# EAGLE board Gleisbesetzmeldung3 (EAGLE 8.1.0)
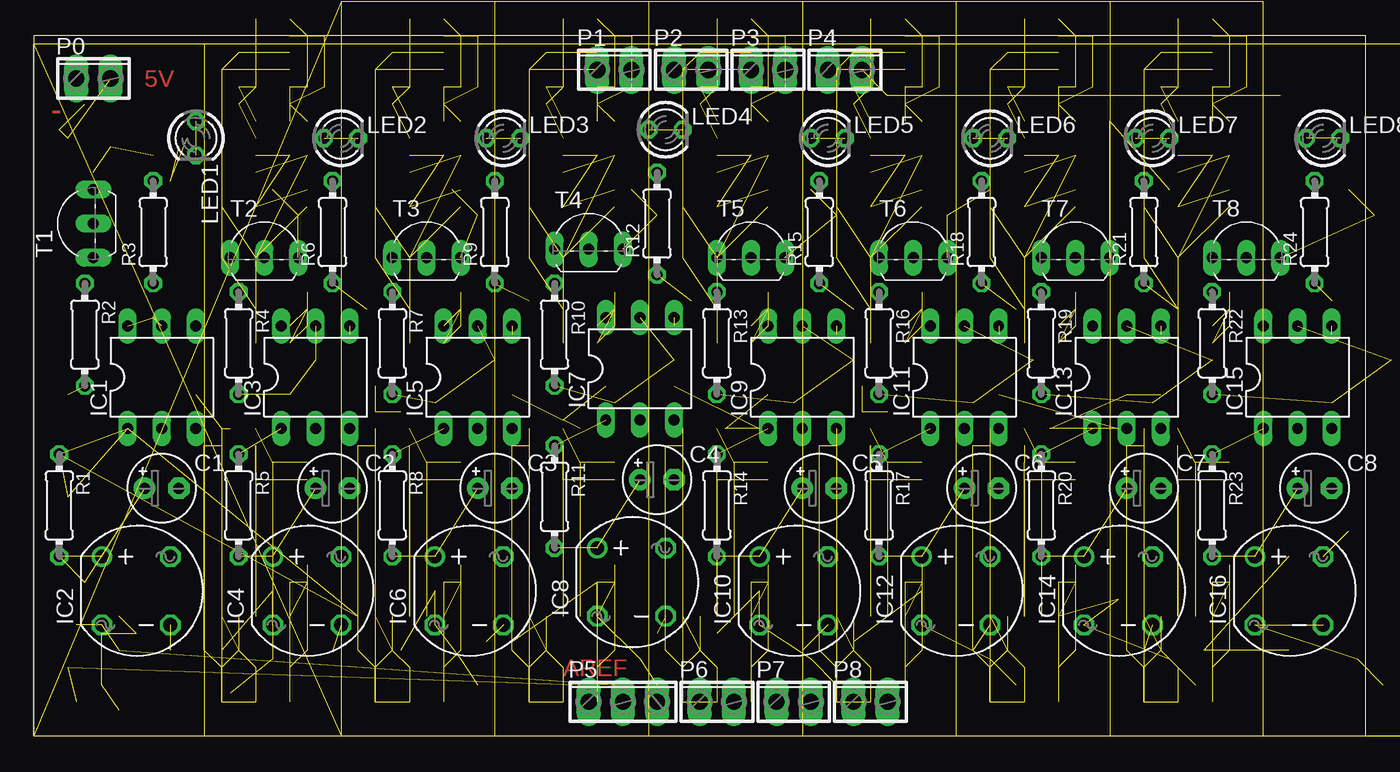
[diagram p0: board, top side]
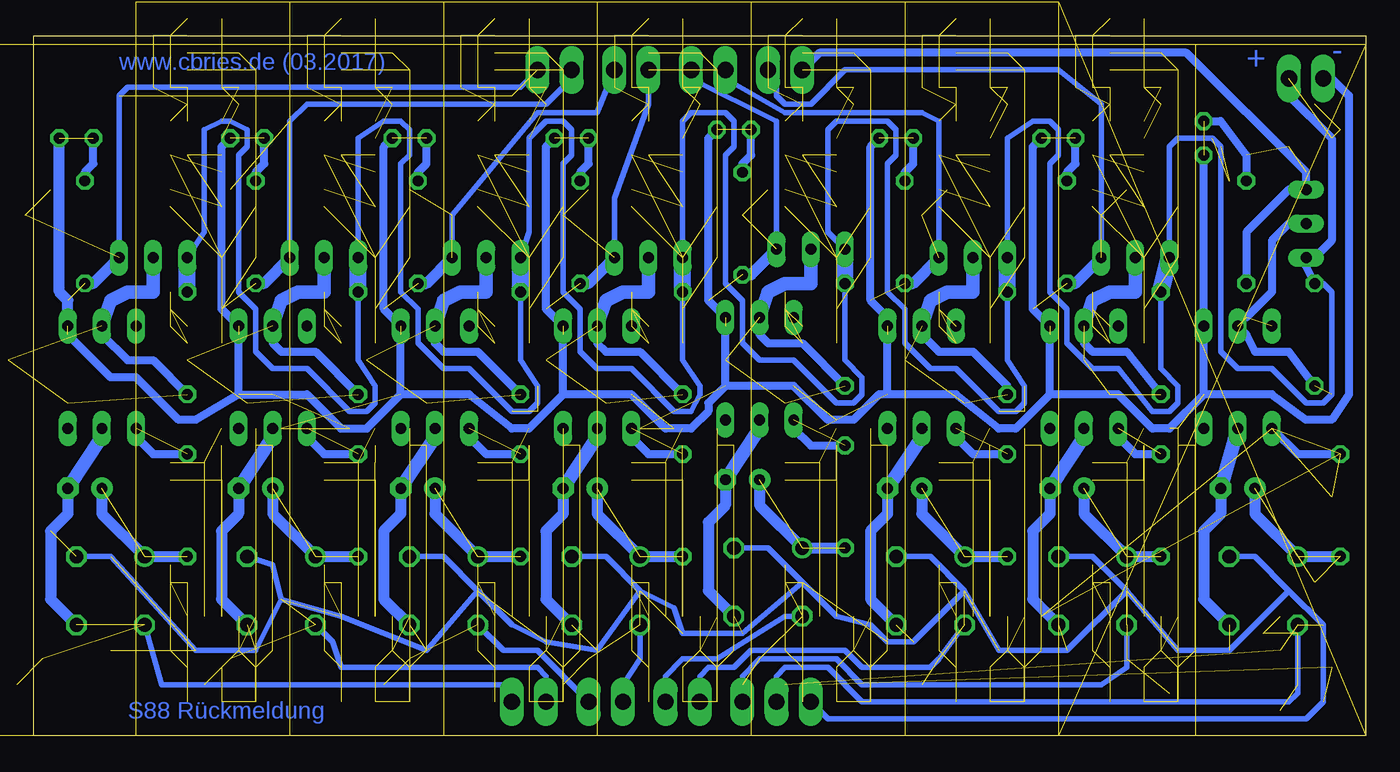
[diagram p1: board, bottom side, seen from below]

Size 99.06 x 52.07 mm. Coordinates in mm from the lower left corner, seen from the top.
Outline: 0,0 99.06,0 99.06,52.07 0,52.07 0,0
Copper layers (1*16): Top 0.035mm / dielectric 1.5mm / Bottom 0.035mm
Design rules "default": minimum track width 10mil, minimum drill 24mil, track to track 8mil, track to pad 8mil, pad to pad 8mil, via to via 8mil, smd to smd 8mil, copper to edge 40mil, drill to drill 8mil, minimum pad ring 10mil, minimum via ring 8mil, stop-mask expansion 4mil, vias tented up to drill 0mil, thermal gap 10mil

## Footprints (pad centres in the part's own frame; a part is rotated, then mirrored left to right if it is on the bottom)
E2,5-5 = drill 0.813 pad 1.6: + -1.27,0 | drill 0.813 pad 1.6 octagon: - 1.27,0
DIL06 = drill 0.813 long: 1 -2.54,-3.81; 2 0,-3.81; 3 2.54,-3.81; 4 2.54,3.81; 5 0,3.81; 6 -2.54,3.81
RB1A = drill 1.016: + -2.54,2.54 | drill 1.016 octagon: - 2.54,-2.54; AC1 2.54,2.54; AC2 -2.54,-2.54
LED3MM = drill 0.813 octagon: A -1.27,0; K 1.27,0
2POL254 = drill 1.2 long: 1 -1.27,0; 2 1.27,0
3POL254 = drill 1.2 long: 1 -2.54,0; 2 0,0; 3 2.54,0
0204/7 = drill 0.813 octagon: 1 -3.81,0; 2 3.81,0
TO92-CBE = drill 0.813 long: B 0,0; C -2.54,0; E 2.54,0

## Placement (x,y rotation side)
C1  22uF, 35V  [E2,5-5]  9.53,18.41 0 top
C2  22uF, 35V  [E2,5-5]  22.23,18.41 0 top
C3  22uF, 35V  [E2,5-5]  34.29,18.41 0 top
C4  22uF, 35V  [E2,5-5]  46.35,19.05 0 top
C5  22uF, 35V  [E2,5-5]  58.42,18.41 0 top
C6  22uF, 35V  [E2,5-5]  70.48,18.41 0 top
C7  22uF, 35V  [E2,5-5]  82.55,18.41 0 top
C8  22uF, 35V  [E2,5-5]  95.25,18.41 0 top
IC1  CNY-17-2  [DIL06]  9.53,26.67 0 top
IC2  S462  [RB1A]  7.62,10.79 0 top
IC3  CNY-17-2  [DIL06]  20.95,26.67 0 top
IC4  S462  [RB1A]  20.32,10.79 0 top
IC5  CNY-17-2  [DIL06]  33.02,26.67 0 top
IC6  S462  [RB1A]  32.38,10.79 0 top
IC7  CNY-17-2  [DIL06]  45.09,27.3 0 top
IC8  S462  [RB1A]  44.45,11.43 0 top
IC9  CNY-17-2  [DIL06]  57.15,26.67 0 top
IC10  S462  [RB1A]  56.52,10.79 0 top
IC11  CNY-17-2  [DIL06]  69.22,26.67 0 top
IC12  S462  [RB1A]  68.58,10.79 0 top
IC13  CNY-17-2  [DIL06]  81.28,26.67 0 top
IC14  S462  [RB1A]  80.64,10.79 0 top
IC15  CNY-17-2  [DIL06]  93.98,26.67 0 top
IC16  S462  [RB1A]  93.34,10.79 0 top
LED1  [LED3MM]  12.06,44.45 270 top
LED2  [LED3MM]  22.86,44.45 0 top
LED3  [LED3MM]  34.92,44.45 0 top
LED4  [LED3MM]  46.99,45.09 0 top
LED5  [LED3MM]  59.05,44.45 0 top
LED6  [LED3MM]  71.12,44.45 0 top
LED7  [LED3MM]  83.19,44.45 0 top
LED8  [LED3MM]  95.89,44.45 0 top
P0  [2POL254]  4.45,48.9 0 top
P1  [2POL254]  43.18,49.53 0 top
P2  [2POL254]  48.9,49.53 0 top
P3  [2POL254]  54.61,49.53 0 top
P4  [2POL254]  60.33,49.53 0 top
P5  [3POL254]  43.81,2.54 0 top
P6  [2POL254]  50.8,2.54 0 top
P7  [2POL254]  56.52,2.54 0 top
P8  [2POL254]  62.23,2.54 0 top
R1  1k  [0204/7]  1.91,17.14 270 top
R2  1k  [0204/7]  3.81,29.84 270 top
R3  220  [0204/7]  8.89,37.47 90 top
R4  1k  [0204/7]  15.24,29.21 270 top
R5  1k  [0204/7]  15.24,17.14 270 top
R6  220  [0204/7]  22.23,37.47 90 top
R7  1k  [0204/7]  26.67,29.21 270 top
R8  1k  [0204/7]  26.67,17.14 270 top
R9  220  [0204/7]  34.29,37.47 90 top
R10  1k  [0204/7]  38.73,29.84 270 top
R11  1k  [0204/7]  38.73,17.78 270 top
R12  220  [0204/7]  46.35,38.1 90 top
R13  1k  [0204/7]  50.8,29.21 270 top
R14  1k  [0204/7]  50.8,17.14 270 top
R15  220  [0204/7]  58.42,37.47 90 top
R16  1k  [0204/7]  62.87,29.21 270 top
R17  1k  [0204/7]  62.87,17.14 270 top
R18  220  [0204/7]  70.48,37.47 90 top
R19  1k  [0204/7]  74.93,29.21 270 top
R20  1k  [0204/7]  74.93,17.14 270 top
R21  220  [0204/7]  82.55,37.47 90 top
R22  1k  [0204/7]  87.63,29.21 270 top
R23  1k  [0204/7]  87.63,17.14 270 top
R24  220  [0204/7]  95.25,37.47 90 top
T1  [TO92-CBE]  4.45,38.1 90 top
T2  [TO92-CBE]  17.14,35.56 0 top
T3  [TO92-CBE]  29.21,35.56 0 top
T4  [TO92-CBE]  41.27,36.2 0 top
T5  [TO92-CBE]  53.34,35.56 0 top
T6  [TO92-CBE]  65.41,35.56 0 top
T7  [TO92-CBE]  77.47,35.56 0 top
T8  [TO92-CBE]  90.17,35.56 0 top

## Library data of the parts
C1-C8 R1-R24 = rcl
IC1 IC3 IC5 IC7 IC9 IC11 IC13 IC15 = ic-package
IC2 IC4 IC6 IC8 IC10 IC12 IC14 IC16 = rectifier
LED1-LED8 = led
P0 P1-P8 = con-phoenix-254
T1-T8 = transistor-neu-to92

## Nets
S$2: IC5.5 IC5.6 R7.2 T3.B
S$3: IC1.5 IC1.6 P0.2 R2.1 R2.2 R4.1 R7.1 R10.1 R13.1 R16.1 R19.1 R22.1 T1.B T1.C T2.C T3.C T4.C T5.C T6.C T7.C T8.C
S$5: IC1.4 IC3.4 IC5.4 IC7.4 IC9.4 IC11.4 IC13.4 IC15.4 LED1.A LED1.K LED2.A LED2.K LED3.A LED3.K LED4.A LED4.K LED5.A LED5.K LED6.A LED6.K LED7.A LED7.K LED8.A LED8.K P0.1 P1.1 P1.2 P2.1 P2.2 P3.1 P3.2 P4.1 P4.2 R3.1 R3.2 R6.1 R6.2 R9.1 R9.2 R12.1 R12.2 R15.1 R15.2 R18.1 R18.2 R21.1 R21.2 R24.1 R24.2 T1.E T2.E T3.E T4.E T5.E T6.E T7.E T8.E
S$6: C2.+ IC4.+ R5.2
S$7: C1.+ IC2.+ R1.2
S$8: IC1.1 R1.1
S$11: IC3.1 R5.1
S$124: IC3.5 IC3.6 R4.2 T2.B
S$127: C3.+ IC6.+ R8.2
S$128: IC5.1 R8.1
S$133: C4.+ IC8.+ R11.2
S$134: IC7.1 R11.1
S$136: IC7.5 IC7.6 R10.2 T4.B
S$139: C5.+ IC10.+ R14.2
S$140: IC9.1 R14.1
S$142: IC9.5 IC9.6 R13.2 T5.B
S$145: C6.+ IC12.+ R17.2
S$146: IC11.1 R17.1
S$148: IC11.5 IC11.6 R16.2 T6.B
S$151: C7.+ IC14.+ R20.2
S$152: IC13.1 R20.1
S$154: IC13.5 IC13.6 R19.2 T7.B
S$157: C8.+ IC16.+ R23.2
S$158: IC15.1 R23.1
S$160: IC15.5 IC15.6 R22.2 T8.B
S$162: C1.- C2.- C3.- C4.- C5.- C6.- C7.- C8.- IC1.2 IC2.- IC2.AC1 IC2.AC2 IC3.2 IC4.- IC4.AC1 IC4.AC2 IC5.2 IC6.- IC6.AC1 IC6.AC2 IC7.2 IC8.- IC8.AC1 IC8.AC2 IC9.2 IC10.- IC10.AC1 IC10.AC2 IC11.2 IC12.- IC12.AC1 IC12.AC2 IC13.2 IC14.- IC14.AC1 IC14.AC2 IC15.2 IC16.- IC16.AC1 IC16.AC2 P5.1 P5.2 P5.3 P6.1 P6.2 P7.1 P7.2 P8.1 P8.2

## Tracks (layer width: path | path; a pad name or v marks a point on that pad's centre or on a via)
S$1  (28 unrouted)
S$2  (3 unrouted)
  Bottom 0.61: 33.02,29.84 31.75,28.57 29.21,28.57 26.67,26.04 R7.2
  Bottom 1.016: IC5.5 32.38,32.38 31.11,33.02 29.21,33.02 T3.B
S$3  (12 unrouted)
  Bottom 0.406: R2.1 3.17,33.66 2.54,33.02 2.54,25.4 3.17,24.77 4.45,24.77 6.99,27.3 9.53,27.3 10.79,28.57 10.79,43.81 11.43,44.45 13.97,44.45 14.61,43.81 T2.C | R4.1 15.24,27.3 13.97,26.04 13.97,24.77 14.61,24.13 15.88,24.13 18.41,27.3 20.32,27.3 22.23,29.21 22.23,31.75 23.5,33.02 23.5,42.55 22.86,43.18 22.86,45.09 23.5,45.72 24.77,45.72 26.67,44.45 T3.C | R7.1 26.67,27.94 25.4,26.04 25.4,24.77 26.04,24.13 27.3,24.13 30.48,27.3 32.38,27.3 34.29,29.21 34.29,31.75 35.56,33.02 35.56,42.55 34.92,43.18 34.92,45.09 35.56,45.72 39.37,45.72 40.01,45.09 40.01,37.47 T4.C | R10.1 38.73,27.94 37.47,26.67 37.47,25.4 38.1,24.77 39.37,24.77 42.55,27.94 45.09,27.94 46.35,29.21 46.35,32.38 47.62,33.66 47.62,43.18 46.99,43.81 46.99,45.72 47.62,46.35 50.16,46.35 50.8,45.72 T5.C | R13.1 50.8,27.94 49.53,26.04 49.53,25.4 50.16,24.13 51.44,24.13 54.61,27.3 57.15,27.3 58.42,28.57 58.42,31.75 59.69,33.02 59.69,42.55 59.05,43.18 59.05,45.09 59.69,45.72 60.96,45.72 62.23,44.45 62.23,37.47 T6.C | R16.1 62.87,27.94 61.59,26.04 61.59,24.77 62.23,24.13 63.5,24.13 66.67,27.3 68.58,27.3 70.48,29.21 70.48,31.75 71.75,33.02 71.75,42.55 71.12,43.18 71.12,45.09 71.75,45.72 73.03,45.72 74.93,44.45 T7.C | R19.1 74.93,27.94 73.66,26.04 73.66,24.77 74.3,24.13 75.56,24.13 78.74,27.3 81.28,27.3 82.55,28.57 82.55,31.75 83.82,33.02 83.82,43.18 83.19,43.81 83.19,45.09 84.45,45.72 85.09,45.72 86.36,45.09 86.36,37.47 T8.C
  Bottom 0.61: R2.1 4.45,34.92 T1.C 3.81,35.56 2.54,36.83 2.54,44.45 5.71,47.62 P0.2 | IC1.5 8.89,29.84 8.26,28.57 5.71,28.57 R2.2 | T1.B 5.71,38.1 6.99,36.83 6.99,33.02 8.89,31.11
  Bottom 1.27: R10.1 T4.C | R16.1 T6.C | R19.1 T7.C | R22.1 T8.C | R4.1 T2.C | R7.1 T3.C | R13.1 T5.C
S$5  (52 unrouted)
  Bottom 0.406: T2.E 19.68,46.99 22.86,49.53 38.73,49.53 41.27,46.99 43.18,46.99 43.81,47.62 43.81,48.9 P1.2 | T3.E 31.75,45.72 33.02,46.35 43.18,46.35 47.62,48.9 P2.1 | T4.E 43.81,45.72 50.16,48.9 P2.2 | T5.E 55.88,40.01 53.34,46.99 P3.1 | T6.E 67.94,38.73 61.59,46.35 57.15,46.35 P3.2 | T7.E 80.01,45.72 78.74,46.99 60.96,46.99 59.05,48.9 P4.1 | T8.E 92.71,47.62 92.08,48.26 62.87,48.26 P4.2
  Bottom 0.61: 12.06,25.4 6.99,25.4 4.45,23.5 2.54,23.5 1.27,25.4 1.27,47.62 2.54,48.9 P0.1 | 12.06,25.4 IC1.4 LED1.K | 23.5,25.4 18.41,25.4 15.88,22.86 14.61,22.86 12.06,25.4 | 23.5,25.4 23.5,29.84 | 23.5,25.4 26.04,22.86 27.3,22.86 30.48,25.4 35.56,25.4 | 35.56,25.4 35.56,29.84 | 47.62,26.04 42.55,26.04 40.01,23.5 38.1,23.5 36.2,25.4 35.56,25.4 | 47.62,26.04 47.62,30.48 | 59.69,25.4 54.61,25.4 52.07,22.86 50.16,22.86 48.9,24.13 48.9,24.77 47.62,26.04 | 59.69,25.4 59.69,29.84 | 59.69,25.4 62.23,22.86 63.5,22.86 66.67,25.4 71.75,25.4 | 71.75,25.4 71.75,29.84 | 83.82,25.4 83.82,29.84 | 83.82,25.4 87,23.5 88.27,23.5 91.44,26.67 93.34,26.67 96.52,29.84 | R3.1 8.89,37.47 5.71,40.64 T1.E 4.45,41.91 13.34,50.8 40.64,50.8 P1.1 | LED1.A 10.79,45.72 8.89,43.18 R3.2 | R6.2 22.23,41.91 21.59,42.55 LED2.A | R9.2 34.29,41.91 33.66,42.55 LED3.A | R12.2 46.35,42.55 45.72,43.18 LED4.A | R15.2 58.42,41.91 57.78,42.55 LED5.A | R18.2 70.48,41.91 69.85,42.55 LED6.A | R21.2 82.55,41.91 81.92,42.55 LED7.A | R24.2 95.25,41.91 94.61,42.55 LED8.A | IC5.4 35.56,31.11 36.83,32.38 36.83,43.81 LED3.K | IC7.4 48.9,32.38 48.9,44.45 LED4.K | IC9.4 60.96,31.75 60.96,43.81 LED5.K | IC11.4 73.03,31.75 73.03,43.81 LED6.K | IC13.4 85.09,31.75 85.09,43.81 LED7.K | IC3.4 24.77,31.75 24.77,43.81 LED2.K | 83.82,25.4 78.74,25.4 76.2,22.86 74.3,22.86 71.75,25.4
  Bottom 0.813: R6.1 21.59,33.66 T2.E | R9.1 33.66,33.66 T3.E | R12.1 45.72,34.29 T4.E | R15.1 57.78,33.66 T5.E | R18.1 69.85,33.66 T6.E | R21.1 81.92,33.66 T7.E | IC15.4 96.52,32.38 97.16,33.02 LED8.K | R24.1 94.61,33.66 T8.E
S$6  (2 unrouted)
  Bottom 0.813: C2.+ 20.95,16.51 IC4.+ R5.2
S$7  (4 unrouted)
  Bottom 0.813: C1.+ 8.26,16.51 IC2.+ R1.2
S$8  (7 unrouted)
  Bottom 0.61: IC1.1 5.08,20.95 R1.1
S$9  (4 unrouted)
S$10  (3 unrouted)
S$11  (1 unrouted)
  Bottom 0.61: IC3.1 18.41,22.23 17.14,20.95 R5.1
S$12  (6 unrouted)
S$13  (3 unrouted)
S$14  (2 unrouted)
S$15  (4 unrouted)
S$16  (3 unrouted)
S$17  (5 unrouted)
S$18  (4 unrouted)
S$19  (3 unrouted)
S$20  (6 unrouted)
S$21  (3 unrouted)
S$22  (2 unrouted)
S$23  (4 unrouted)
S$24  (3 unrouted)
S$25  (5 unrouted)
S$26  (4 unrouted)
S$27  (3 unrouted)
S$28  (6 unrouted)
S$29  (3 unrouted)
S$30  (2 unrouted)
S$31  (4 unrouted)
S$32  (3 unrouted)
S$33  (5 unrouted)
S$34  (4 unrouted)
S$35  (3 unrouted)
S$36  (6 unrouted)
S$37  (3 unrouted)
S$38  (2 unrouted)
S$39  (4 unrouted)
S$40  (3 unrouted)
S$41  (5 unrouted)
S$42  (4 unrouted)
S$43  (3 unrouted)
S$44  (6 unrouted)
S$45  (3 unrouted)
S$46  (2 unrouted)
S$47  (4 unrouted)
S$48  (3 unrouted)
S$49  (5 unrouted)
S$50  (4 unrouted)
S$51  (3 unrouted)
S$52  (6 unrouted)
S$53  (3 unrouted)
S$54  (2 unrouted)
S$55  (4 unrouted)
S$56  (3 unrouted)
S$57  (5 unrouted)
S$58  (4 unrouted)
S$59  (3 unrouted)
S$60  (6 unrouted)
S$61  (3 unrouted)
S$62  (2 unrouted)
S$63  (4 unrouted)
S$64  (3 unrouted)
S$65  (5 unrouted)
S$66  (4 unrouted)
S$67  (3 unrouted)
S$68  (6 unrouted)
S$69  (3 unrouted)
S$70  (3 unrouted)
S$71  (4 unrouted)
S$72  (4 unrouted)
S$73  (8 unrouted)
S$74  (4 unrouted)
S$75  (3 unrouted)
S$76  (6 unrouted)
S$77  (3 unrouted)
S$78  (3 unrouted)
S$79  (4 unrouted)
S$80  (4 unrouted)
S$81  (8 unrouted)
S$82  (4 unrouted)
S$83  (3 unrouted)
S$84  (6 unrouted)
S$85  (3 unrouted)
S$86  (3 unrouted)
S$87  (4 unrouted)
S$88  (4 unrouted)
S$89  (8 unrouted)
S$90  (4 unrouted)
S$91  (3 unrouted)
S$92  (6 unrouted)
S$93  (3 unrouted)
S$94  (3 unrouted)
S$95  (4 unrouted)
S$96  (4 unrouted)
S$97  (8 unrouted)
S$98  (4 unrouted)
S$99  (3 unrouted)
S$100  (6 unrouted)
S$101  (3 unrouted)
S$102  (3 unrouted)
S$103  (4 unrouted)
S$104  (4 unrouted)
S$105  (8 unrouted)
S$106  (4 unrouted)
S$107  (3 unrouted)
S$108  (6 unrouted)
S$109  (3 unrouted)
S$110  (3 unrouted)
S$111  (4 unrouted)
S$112  (5 unrouted)
S$113  (8 unrouted)
S$114  (4 unrouted)
S$115  (3 unrouted)
S$116  (6 unrouted)
S$117  (3 unrouted)
S$118  (3 unrouted)
S$119  (4 unrouted)
S$120  (4 unrouted)
S$121  (8 unrouted)
S$122  (4 unrouted)
S$124  (3 unrouted)
  Bottom 0.61: IC3.5 20.95,29.21 20.32,28.57 17.78,28.57 R4.2
  Bottom 1.016: IC3.5 20.32,32.38 19.05,33.02 17.14,33.02 T2.B
S$127  (2 unrouted)
  Bottom 0.813: C3.+ 33.02,16.51 IC6.+ R8.2
S$128  (1 unrouted)
  Bottom 0.61: IC5.1 30.48,22.23 29.21,20.95 R8.1
S$133  (2 unrouted)
  Bottom 0.813: C4.+ 45.09,17.14 IC8.+ R11.2
S$134  (1 unrouted)
  Bottom 0.61: IC7.1 42.55,22.86 41.27,21.59 R11.1
S$136  (3 unrouted)
  Bottom 0.61: IC7.5 45.09,29.84 44.45,29.21 41.91,29.21 R10.2
  Bottom 1.016: IC7.5 44.45,33.02 43.18,33.66 41.27,33.66 T4.B
S$139  (2 unrouted)
  Bottom 0.813: C5.+ 57.15,16.51 IC10.+ R14.2
S$140  (1 unrouted)
  Bottom 0.61: IC9.1 54.61,22.23 53.34,20.95 R14.1
S$142  (3 unrouted)
  Bottom 0.61: IC9.5 57.15,29.21 56.52,28.57 53.98,28.57 R13.2
  Bottom 1.016: IC9.5 56.52,32.38 55.24,33.02 53.34,33.02 T5.B
S$145  (2 unrouted)
  Bottom 0.813: C6.+ 69.22,16.51 IC12.+ R17.2
S$146  (1 unrouted)
  Bottom 0.61: IC11.1 66.67,22.23 65.41,20.95 R17.1
S$148  (3 unrouted)
  Bottom 0.61: IC11.5 69.22,29.21 68.58,28.57 66.04,28.57 R16.2
  Bottom 1.016: IC11.5 68.58,32.38 67.31,33.02 65.41,33.02 T6.B
S$151  (2 unrouted)
  Bottom 0.813: C7.+ 81.28,16.51 IC14.+ R20.2
S$152  (1 unrouted)
  Bottom 0.61: IC13.1 78.74,22.23 77.47,20.95 R20.1
S$154  (3 unrouted)
  Bottom 0.61: IC13.5 81.28,29.21 80.64,28.57 78.11,28.57 R19.2
  Bottom 1.016: IC13.5 80.64,32.38 79.38,33.02 77.47,33.02 T7.B
S$157  (2 unrouted)
  Bottom 0.813: C8.+ 93.98,16.51 IC16.+ R23.2
S$158  (1 unrouted)
  Bottom 0.61: IC15.1 91.44,22.23 90.17,20.95 R23.1
S$160  (3 unrouted)
  Bottom 0.61: IC15.5 93.98,29.84 92.08,27.94 90.17,27.94 R22.2
  Bottom 1.016: IC15.5 93.34,32.38 92.08,33.02 90.17,33.02 T8.B
S$162  (43 unrouted)
  Bottom 0.406: IC16.AC1 93.34,13.34 87,6.35 82.55,6.35 80.64,10.16 | IC14.AC1 81.28,12.7 80.64,10.16 | IC12.AC1 68.58,13.34 66.04,10.79 | IC10.AC1 56.52,13.34 53.98,10.79 | IC8.AC1 44.45,13.97 41.91,11.43 | IC6.AC1 32.38,13.34 29.84,10.79 | IC4.AC1 20.32,13.34 17.78,10.79 | IC2.AC1 8.26,13.34 5.71,10.79 | 5.71,10.79 3.17,8.26 3.17,2.54 4.45,1.27 40.01,1.27 P5.1 | 5.71,10.79 10.16,6.35 13.97,6.35 17.78,10.79 | 17.78,10.79 22.23,6.35 27.3,6.35 29.84,10.79 | 29.84,10.79 33.66,6.99 35.56,6.99 36.83,8.26 39.37,8.89 41.91,11.43 | 41.91,11.43 46.35,7.62 50.8,7.62 51.44,9.53 53.98,10.79 | 53.98,10.79 57.15,6.35 60.96,6.99 63.5,8.26 66.04,10.79 | 66.04,10.79 69.85,6.35 76.2,8.89 80.64,10.16 | IC2.AC2 5.08,3.17 5.71,2.54 37.47,2.54 40.01,5.08 43.18,5.08 43.81,4.45 P5.2 | IC8.AC2 43.18,8.89 48.26,5.71 50.8,5.71 52.07,4.45 P6.2 | IC4.AC2 17.78,5.08 19.68,3.81 37.47,3.81 39.37,5.71 45.09,5.71 46.35,4.45 P5.3 | IC6.AC2 31.75,5.71 32.38,5.08 37.47,5.08 38.73,6.35 45.72,6.35 46.99,5.08 48.9,5.08 49.53,4.45 P6.1 | IC10.AC2 53.98,5.71 55.24,3.81 P7.1 | IC12.AC2 64.14,6.35 61.59,6.35 P7.2 | IC14.AC2 76.83,6.99 76.2,5.08 61.59,5.08 60.96,4.45 P8.1 | IC16.AC2 89.53,3.81 64.14,3.81 63.5,3.17 P8.2
  Bottom 0.813: C8.- 96.52,16.51 97.79,15.24 97.79,10.16 IC16.- | C7.- 83.82,16.51 85.09,15.24 85.09,10.16 IC14.- | C6.- 71.75,16.51 73.03,15.24 73.03,10.16 IC12.- | C5.- 59.69,16.51 60.96,15.24 60.96,10.16 IC10.- | C4.- 47.62,17.14 48.9,15.88 48.9,10.79 IC8.- | C3.- 35.56,16.51 36.83,15.24 36.83,10.16 IC6.- | C2.- 23.5,16.51 24.77,15.24 24.77,10.16 IC4.- | C1.- 10.79,16.51 12.06,15.24 12.06,10.16 IC2.-
  Bottom 1.016: IC15.2 93.98,22.23 C8.- | IC13.2 81.28,22.23 C7.- | IC11.2 69.22,22.23 C6.- | IC9.2 57.15,22.23 C5.- | IC7.2 45.09,22.86 C4.- | IC5.2 33.02,22.23 C3.- | IC3.2 20.95,22.23 C2.- | IC1.2 C1.-

## Text on the board
Top: 5V | - | AREF
Bottom: - | + | www.cbries.de (03.2017) | S88 Rückmeldung